# EAGLE board IronMan_ISTA (EAGLE 7.6.0)
AUTHOR: Kirchschlager Raimund
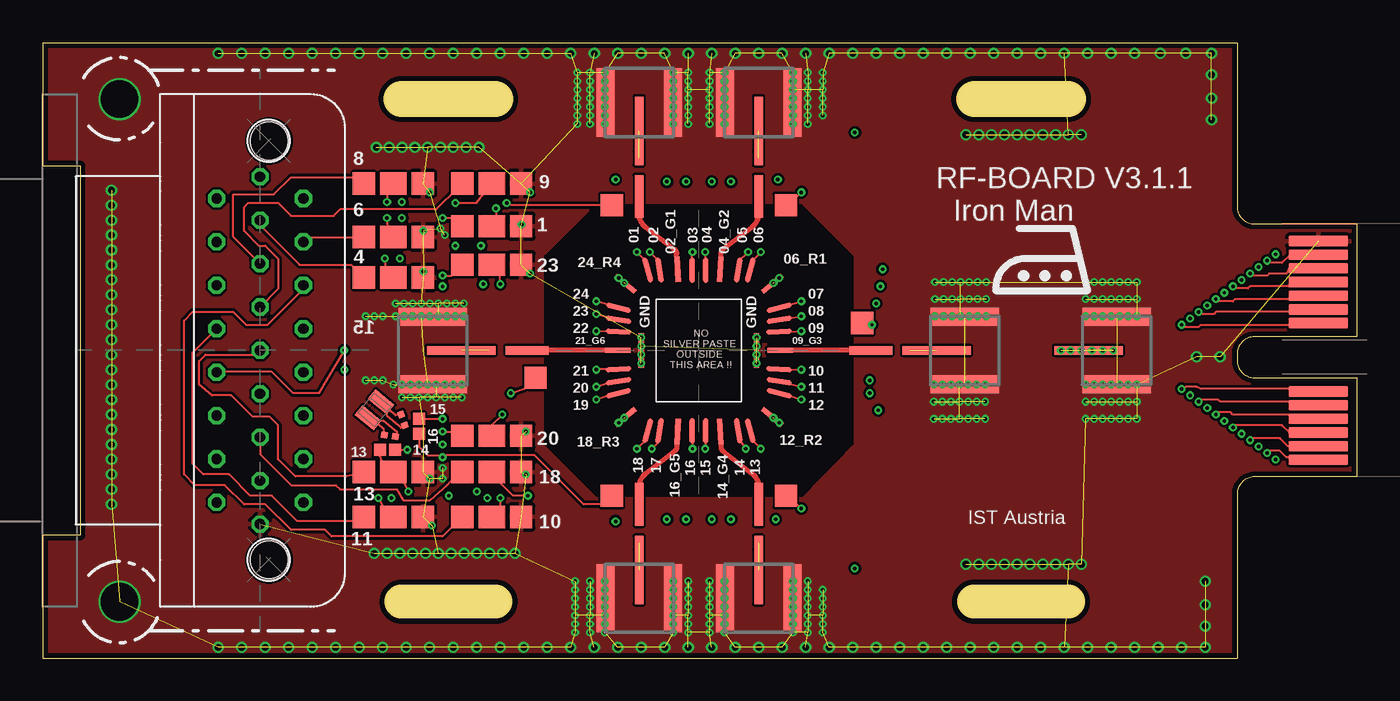
[diagram p0: board, top side]
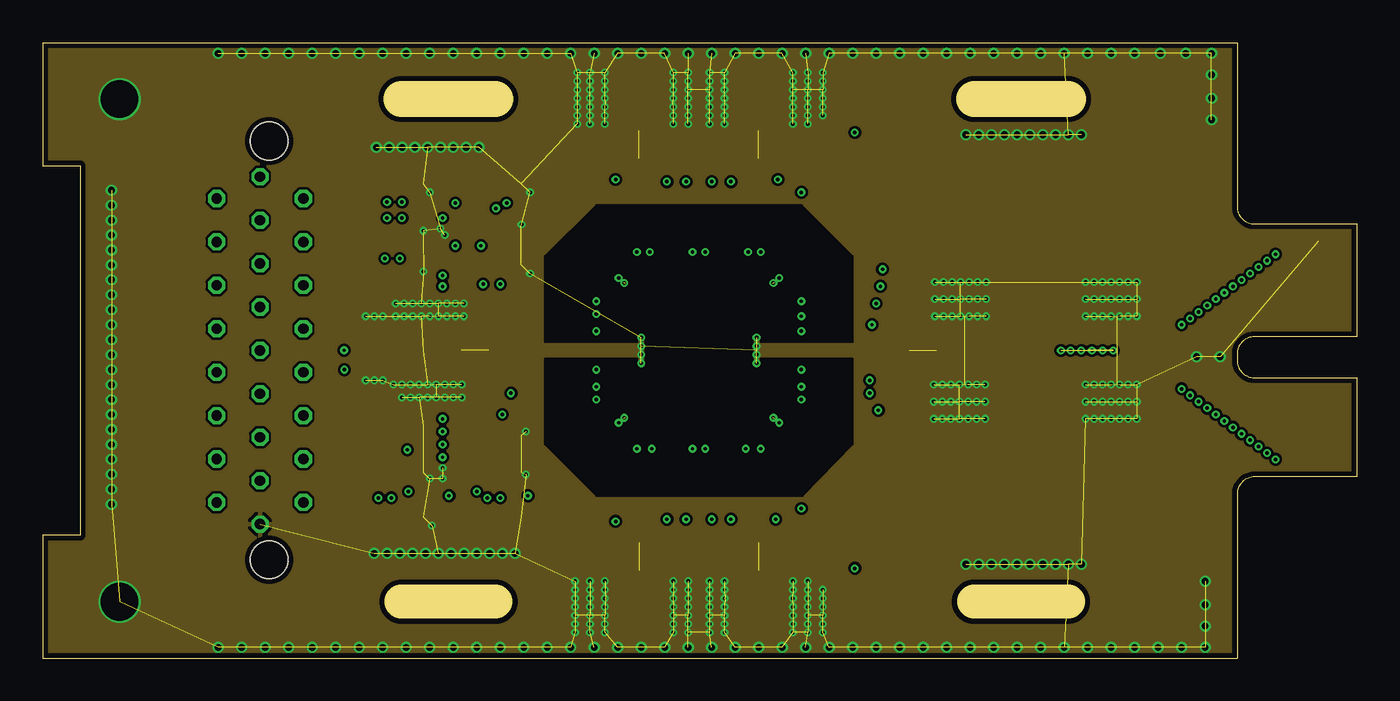
[diagram p1: board, inner layer Route2]
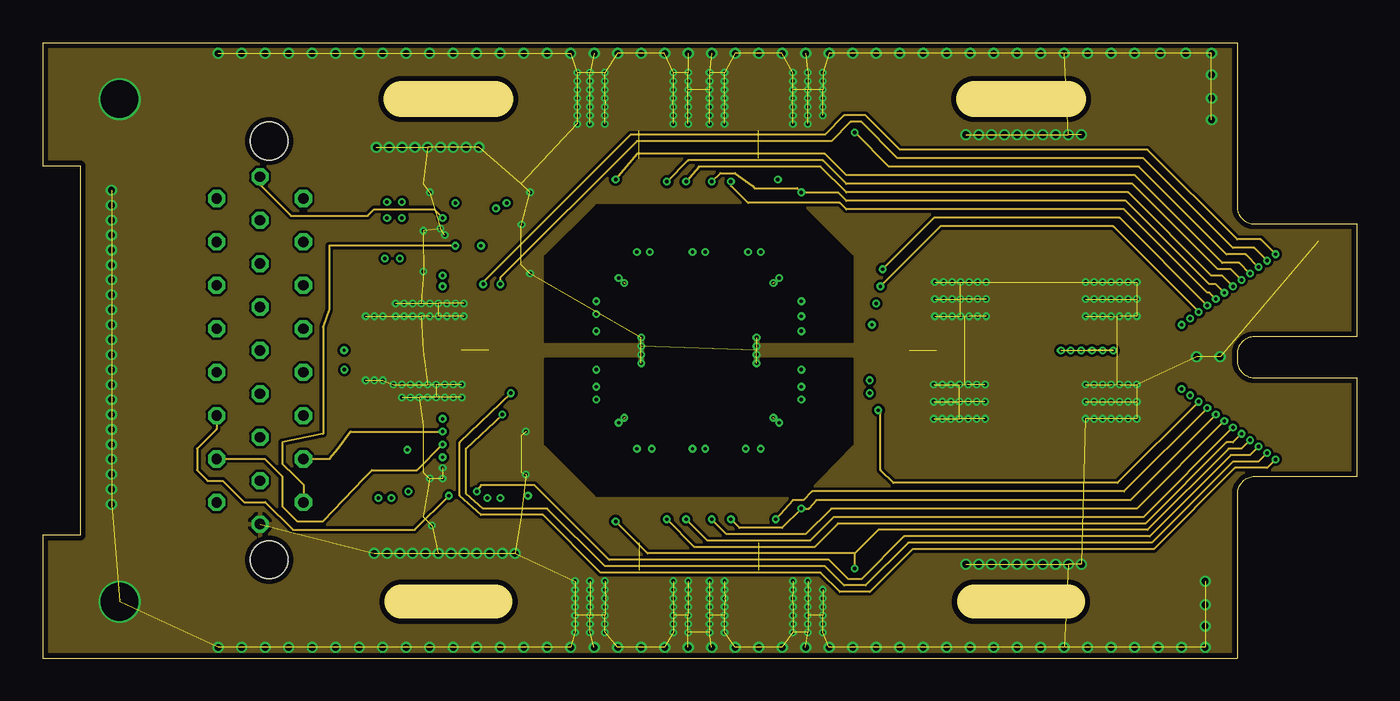
[diagram p2: board, inner layer Route3]
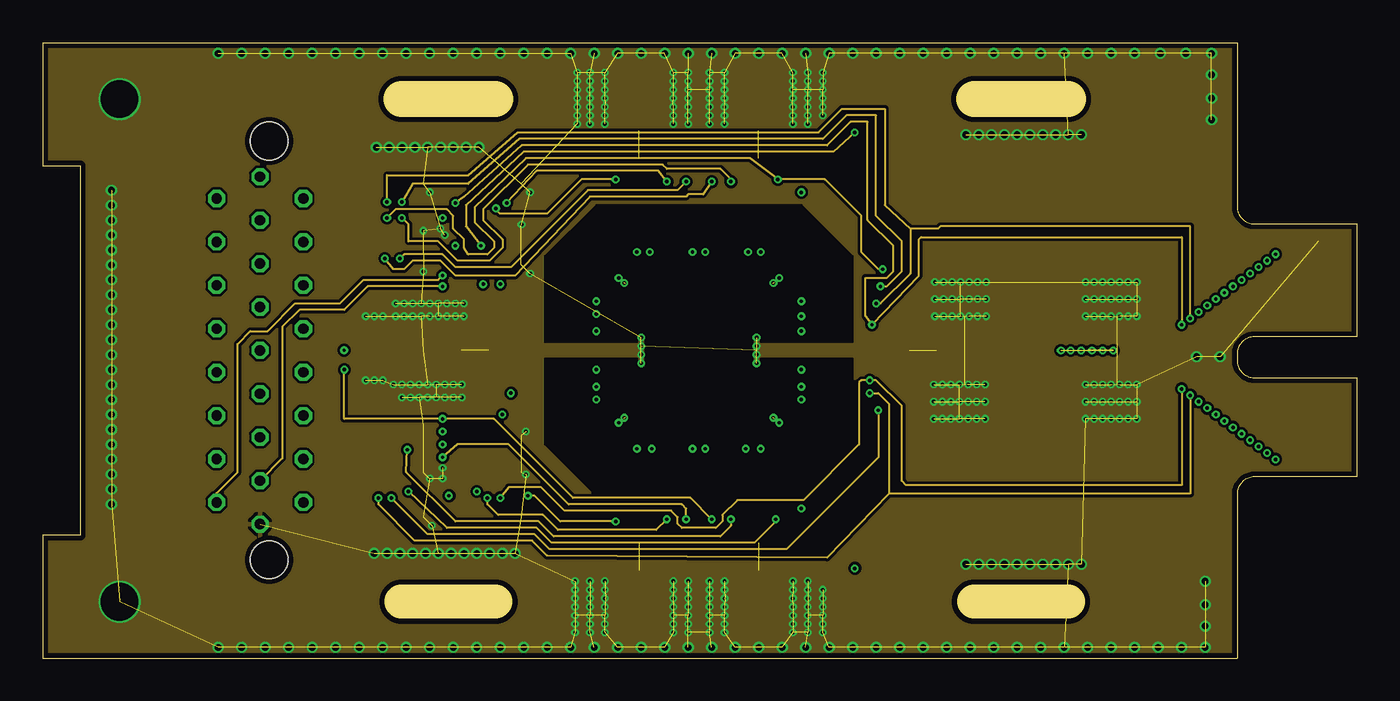
[diagram p3: board, inner layer Route14]
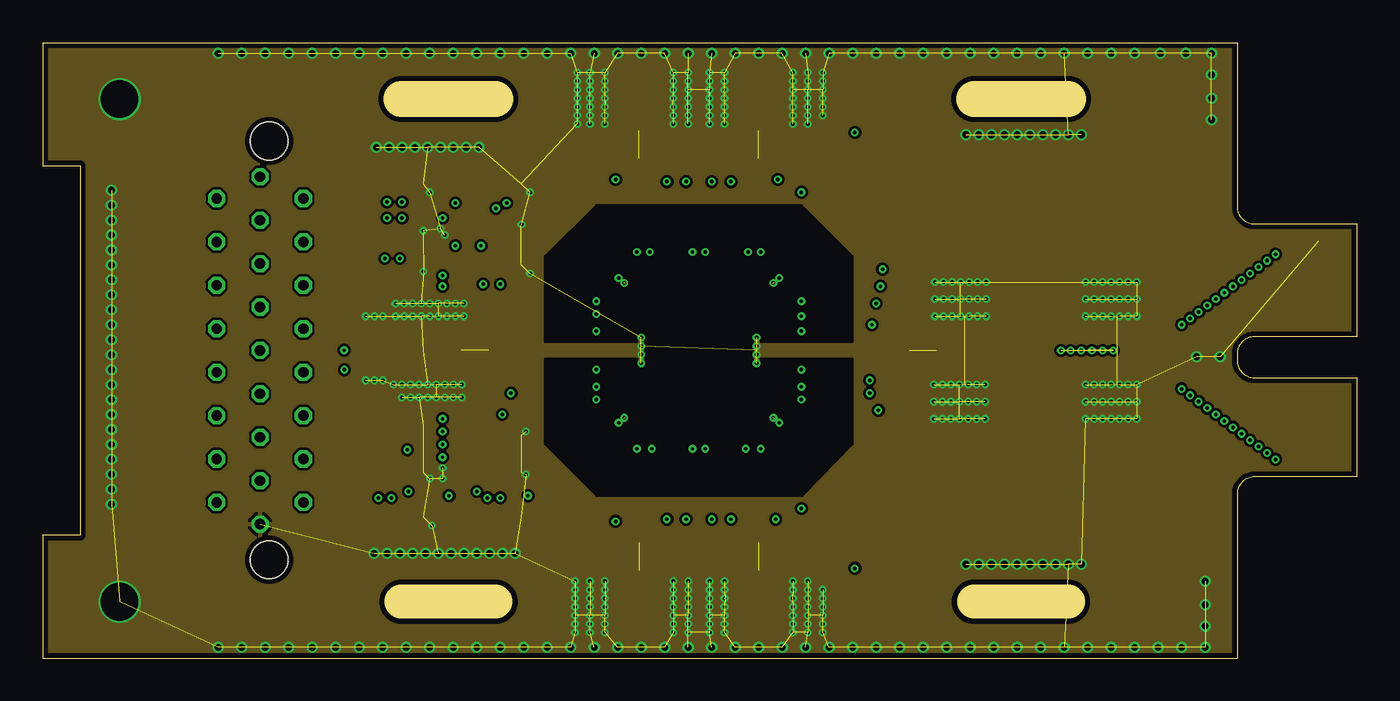
[diagram p4: board, inner layer Route15]
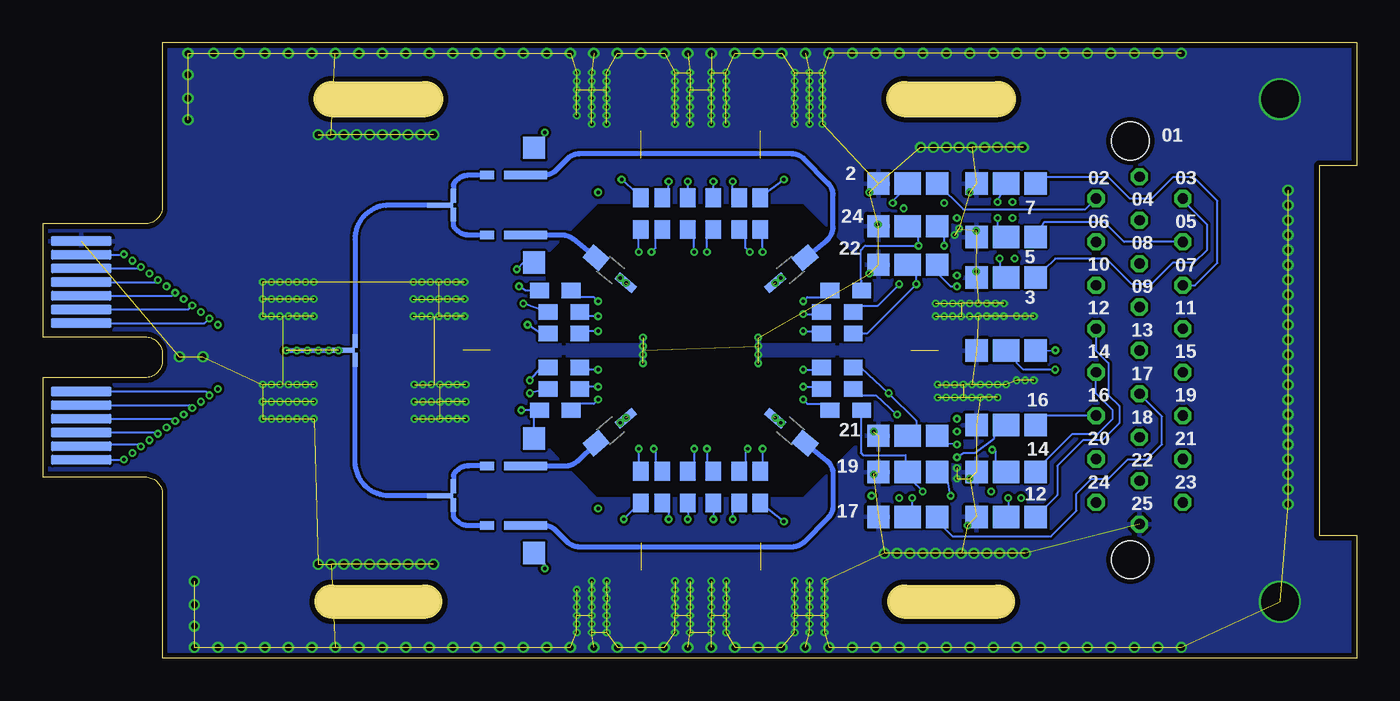
[diagram p5: board, bottom side, seen from below]

Size 76.9 x 36 mm. Coordinates in mm from the lower left corner, seen from the top.
Outline: 26.5,3.3 21,3.3
Outline: 26.5,32.7 21,32.7
Outline: 60,32.7 54.5,32.7
Outline: 60,3.3 54.5,3.3
Outline: 0,36 0,28.8 2.2,28.8 2.2,7.2 0,7.2 0,0 69.9,0 69.9,9.6 arc-90 70.9,10.6 76.9,10.6 76.9,16.4 70.9,16.4 arc-90 69.9,17.4 69.9,17.8 arc-90 70.9,18.8 76.9,18.8 76.9,25.4 70.9,25.4 arc-90 69.9,26.4 69.9,36 0,36
Copper layers (1+2+3*14+15+16): Top 0.035mm / dielectric 0.2mm / Route2 0.035mm / dielectric 0.36mm / Route3 0.035mm / dielectric 0.28mm / Route14 0.035mm / dielectric 0.36mm / Route15 0.035mm / dielectric 0.2mm / Bottom 0.035mm
Design rules "PCB-POOL HighSpec_ML6+ *": minimum track width 0.125mm, minimum drill 0.2mm, track to track 0.125mm, track to pad 0.125mm, pad to pad 0.125mm, via to via 0.125mm, smd to smd 0.125mm, copper to edge 0.3mm, drill to drill 0.2mm, minimum pad ring 0.2mm, minimum via ring 0.125mm, stop-mask expansion 0.065mm, vias tented up to drill 0.3mm, thermal gap 0.2mm
Net classes: 0 GND: clearance 0.15 mm; 1 RF: clearance 2 mm
Holes 2.2 mm at 13.25,5.75 13.25,30.25

## Footprints (pad centres in the part's own frame; a part is rotated, then mirrored left to right if it is on the bottom)
BIAS_TEE_DOWN_0603 = smd 0.8 x 0.5: HF 2.75,0 | smd 1.3 x 1.3: LF 0,1.6 | smd 2.5 x 0.5: OUT 0.5,0
BIAS_TEE_UP_0603 = smd 0.8 x 0.5: HF 2.75,0 | smd 1.3 x 1.3: LF 0,-1.6 | smd 2.5 x 0.5: OUT 0.5,0
24DC+10RF/400MU-PADS/0.7X0.7_V1.0 = smd 1.5 x 0.3 rotated 105: DC$01 -3,4.7 | smd 1.5 x 0.3 rotated 99: DC§02 -2.3,4.7 | smd 0.3 x 1.5: DC§03 -0.4,4.7; DC§04 0.4,4.7; DC§15 0.4,-4.7; DC§16 -0.4,-4.7 | smd 1.5 x 0.3 rotated 81: DC§05 2.3,4.7 | smd 1.5 x 0.3 rotated 75: DC§06 3,4.7 | smd 1.5 x 0.3 rotated 195: DC§07 4.7,2.5 | smd 1.5 x 0.3 rotated 189: DC§08 4.7,1.8 | smd 1.5 x 0.3 rotated 183: DC§09 4.7,1.1 | smd 1.5 x 0.3 rotated 177: DC§10 4.7,-1.1 | smd 1.5 x 0.3 rotated 171: DC§11 4.7,-1.8 | smd 1.5 x 0.3 rotated 165: DC§12 4.7,-2.5 | smd 1.5 x 0.3 rotated 285: DC§13 3,-4.7 | smd 1.5 x 0.3 rotated 279: DC§14 2.3,-4.7 | smd 1.5 x 0.3 rotated 261: DC§17 -2.3,-4.7 | smd 1.5 x 0.3 rotated 255: DC§18 -3,-4.7 | smd 1.5 x 0.3 rotated 15: DC§19 -4.7,-2.5 | smd 1.5 x 0.3 rotated 9: DC§20 -4.7,-1.8 | smd 1.5 x 0.3 rotated 3: DC§21 -4.7,-1.1 | smd 1.5 x 0.3 rotated 357: DC§22 -4.7,1.1 | smd 1.5 x 0.3 rotated 351: DC§23 -4.7,1.8 | smd 1.5 x 0.3 rotated 345: DC§24 -4.7,2.5 | smd 0.3 x 2: GND$1 -3.375,0; GND$2 3.375,0 | smd 1.5 x 0.3 rotated 93: RF$02_G1 -1.25,4.75 | smd 1.5 x 0.3 rotated 87: RF$04_G2 1.25,4.75 | smd 1.5 x 0.3 rotated 40: RF$06_R1 4.3,3.9; RF$18_R3 -4.3,-3.9 | smd 1.5 x 0.3: RF$09_G3 4.75,0; RF$21_G6 -4.75,0 | smd 1.5 x 0.3 rotated 140: RF$12_R2 4.3,-3.9; RF$24_R4 -4.3,3.9 | smd 1.5 x 0.3 rotated 273: RF$14_G4 1.25,-4.75 | smd 1.5 x 0.3 rotated 267: RF$16_G5 -1.25,-4.75
25_SOCKET_M83513/13-D_V2 = drill 0.6 octagon: 01 10.16,0; 02 8.89,-2.54; 03 8.89,2.54; 04 7.62,0; 05 6.35,2.54; 06 6.35,-2.54; 07 3.81,2.54; 08 5.08,0; 09 2.54,0; 10 3.81,-2.54; 11 1.27,2.54; 12 1.27,-2.54; 13 0,0; 14 -1.27,-2.54; 15 -1.27,2.54; 16 -3.81,-2.54; 17 -2.54,0; 18 -5.08,0; 19 -3.81,2.54; 20 -6.35,-2.54; 21 -6.35,2.54; 22 -7.62,0; 23 -8.89,2.54; 24 -8.89,-2.54; 25 -10.16,0
SMD0.8-0,5 = smd 0.8 x 0.5: 1 0,0
L_MATCH = smd 1.25 x 1: IN 1.125,0 | smd 1.3 x 0.5: OUT -1.15,0
LP-FILTER/1_STAGE/OS/0603_TOP = smd 1.3 x 1.3: $1 -1.6,0.01; $6 1.85,0.01 | smd 1.55 x 1.3: $4 0.125,0.01
LP-FILTER/1_STAGE/OS/0603_BOTTOM = smd 1.3 x 1.3 bottom: $1 -1.6,0.01; $6 1.85,0.01 | smd 1.55 x 1.3 bottom: $4 0.125,0.01
LP-FILTER/RESISTOR/0603_BOTTOM = smd 1.1 x 0.9 bottom: IN -0.925,0; OUT 0.925,0
SMP_STRAIGHT_MINI = smd 0.5 x 4: 1 0,1.653 | smd 1.05 x 4: 2@1 -1.975,0; 2@2 1.975,0
TP07SQ = smd 0.7 x 0.7: TP 0,0
MEC8-113-02-L-D-RA1 = smd 0.6 x 3.5: 1 6.4,0.15; 3 5.6,0.15; 5 4.8,0.15; 7 4,0.15; 9 3.2,0.15; 11 2.4,0.15; 13 -1.6,0.15; 15 -2.4,0.15; 17 -3.2,0.15; 19 -4,0.15; 21 -4.8,0.15; 23 -5.6,0.15; 25 -6.4,0.15 | smd 0.6 x 3.5 bottom: 2 6.4,0.15; 4 5.6,0.15; 6 4.8,0.15; 8 4,0.15; 10 3.2,0.15; 12 2.4,0.15; 14 -1.6,0.15; 16 -2.4,0.15; 18 -3.2,0.15; 20 -4,0.15; 22 -4.8,0.15; 24 -5.6,0.15; 26 -6.4,0.15
RX-BR_V1 = smd 0.406 x 0.406 rotated 105: I$1 -0.02,1.08; U$1 0.63,1.23 | smd 0.406 x 0.406 rotated 165: I$2 1.08,-0.02; U$2 1.23,0.63 | smd 1.422 x 0.711 rotated 45: P$2 -0.02,-0.87; P$3 -0.87,-0.02
T_JUNCTION_0.3MM = smd 0.3 x 1.5 bottom: P$1 0,-0.75 | smd 0.8 x 0.3 bottom: P$2 -0.55,0.03; P$3 0.55,0.03 | smd 1 x 0.125 bottom: P$4 0,-0.06

## Placement (x,y rotation side)
B$1  [BIAS_TEE_DOWN_0603]  34.9,26.5 90 top
B$2  [BIAS_TEE_UP_0603]  41.9,26.5 90 top
B$3  BIASTEEDOWN  [BIAS_TEE_DOWN_0603]  47.96,18 0 top
B$4  [BIAS_TEE_DOWN_0603]  41.9,9.5 270 top
B$5  [BIAS_TEE_UP_0603]  34.9,9.5 270 top
B$6  BIASTEEDOWN  [BIAS_TEE_DOWN_0603]  28.84,18 180 top
B$7  [BIAS_TEE_UP_0603]  48.15,28.25 180 bottom
B$8  [BIAS_TEE_DOWN_0603]  48.15,24.75 180 bottom
B$9  [BIAS_TEE_UP_0603]  48.15,11.25 180 bottom
B$10  [BIAS_TEE_DOWN_0603]  48.15,7.75 180 bottom
E$1  24DC+10RF  [24DC+10RF/400MU-PADS/0.7X0.7_V1.0]  38.4,18 0 top
E$2  [25_SOCKET_M83513/13-D_V2]  12.71,18 90 top
E$30  [SMD0.8-0,5]  50.9,11.25 0 bottom
L$1  L_MATCH  [L_MATCH]  33.14,22.7 40 bottom
L$2  L_MATCH  [L_MATCH]  43.66,22.7 140 bottom
L$3  L_MATCH  [L_MATCH]  43.66,13.3 220 bottom
L$4  L_MATCH  [L_MATCH]  33.14,13.3 320 bottom
LP$1  LP-FILTER/1-STAGETOP  [LP-FILTER/1_STAGE/OS/0603_TOP]  20.4,27.75 0 top
LP$2  LP-FILTER/1-STAGETOP  [LP-FILTER/1_STAGE/OS/0603_TOP]  20.4,24.62 0 top
LP$3  LP-FILTER/1-STAGETOP  [LP-FILTER/1_STAGE/OS/0603_TOP]  20.4,22.25 0 top
LP$4  LP-FILTER/1-STAGETOP  [LP-FILTER/1_STAGE/OS/0603_TOP]  20.4,18 180 bottom
LP$5  LP-FILTER/1-STAGETOP  [LP-FILTER/1_STAGE/OS/0603_TOP]  20.4,10.88 0 top
LP$6  LP-FILTER/1-STAGETOP  [LP-FILTER/1_STAGE/OS/0603_TOP]  20.4,8.25 0 top
LP$7  LP-FILTER/1-STAGEBOT  [LP-FILTER/1_STAGE/OS/0603_BOTTOM]  20.4,27.75 0 top
LP$8  LP-FILTER/1-STAGEBOT  [LP-FILTER/1_STAGE/OS/0603_BOTTOM]  20.4,24.62 0 top
LP$9  LP-FILTER/1-STAGEBOT  [LP-FILTER/1_STAGE/OS/0603_BOTTOM]  20.4,22.25 0 top
LP$10  LP-FILTER/1-STAGEBOT  [LP-FILTER/1_STAGE/OS/0603_BOTTOM]  26.15,27.75 0 top
LP$11  LP-FILTER/1-STAGEBOT  [LP-FILTER/1_STAGE/OS/0603_BOTTOM]  26.15,8.25 0 top
LP$12  LP-FILTER/1-STAGEBOT  [LP-FILTER/1_STAGE/OS/0603_BOTTOM]  20.4,13.62 0 top
LP$13  LP-FILTER/1-STAGEBOT  [LP-FILTER/1_STAGE/OS/0603_BOTTOM]  20.4,10.88 0 top
LP$14  LP-FILTER/1-STAGEBOT  [LP-FILTER/1_STAGE/OS/0603_BOTTOM]  20.4,8.25 0 top
LP$15  LP-FILTER/1-STAGETOP  [LP-FILTER/1_STAGE/OS/0603_TOP]  26.15,27.75 0 top
LP$16  LP-FILTER/1-STAGETOP  [LP-FILTER/1_STAGE/OS/0603_TOP]  26.15,25.25 0 top
LP$17  LP-FILTER/1-STAGETOP  [LP-FILTER/1_STAGE/OS/0603_TOP]  26.15,23 0 top
LP$18  LP-FILTER/1-STAGETOP  [LP-FILTER/1_STAGE/OS/0603_TOP]  26.15,13 0 top
LP$19  LP-FILTER/1-STAGETOP  [LP-FILTER/1_STAGE/OS/0603_TOP]  26.15,10.88 0 top
LP$20  LP-FILTER/1-STAGETOP  [LP-FILTER/1_STAGE/OS/0603_TOP]  26.15,8.25 0 top
LP$21  LP-FILTER/1-STAGEBOT  [LP-FILTER/1_STAGE/OS/0603_BOTTOM]  26.15,25.25 0 top
LP$22  LP-FILTER/1-STAGEBOT  [LP-FILTER/1_STAGE/OS/0603_BOTTOM]  26.15,23 0 top
LP$23  LP-FILTER/1-STAGEBOT  [LP-FILTER/1_STAGE/OS/0603_BOTTOM]  26.15,13 0 top
LP$24  LP-FILTER/1-STAGEBOT  [LP-FILTER/1_STAGE/OS/0603_BOTTOM]  26.15,10.88 0 top
R$1  10K  [LP-FILTER/RESISTOR/0603_BOTTOM]  34.9,26 270 top
R$2  10K  [LP-FILTER/RESISTOR/0603_BOTTOM]  36.15,26 270 top
R$3  10K  [LP-FILTER/RESISTOR/0603_BOTTOM]  37.65,26 270 top
R$4  10K  [LP-FILTER/RESISTOR/0603_BOTTOM]  39.15,26 270 top
R$5  10K  [LP-FILTER/RESISTOR/0603_BOTTOM]  40.65,26 270 top
R$6  10K  [LP-FILTER/RESISTOR/0603_BOTTOM]  41.9,26 270 top
R$7  10K  [LP-FILTER/RESISTOR/0603_BOTTOM]  46.4,20.25 180 top
R$8  10K  [LP-FILTER/RESISTOR/0603_BOTTOM]  46.4,19 180 top
R$9  10K  [LP-FILTER/RESISTOR/0603_BOTTOM]  46.4,17 180 top
R$10  10K  [LP-FILTER/RESISTOR/0603_BOTTOM]  46.4,15.75 180 top
R$11  10K  [LP-FILTER/RESISTOR/0603_BOTTOM]  46.9,14.5 180 top
R$12  10K  [LP-FILTER/RESISTOR/0603_BOTTOM]  41.9,10 90 top
R$19  10K  [LP-FILTER/RESISTOR/0603_BOTTOM]  29.9,14.5 0 top
R$20  10K  [LP-FILTER/RESISTOR/0603_BOTTOM]  30.4,15.75 0 top
R$21  10K  [LP-FILTER/RESISTOR/0603_BOTTOM]  30.4,17 0 top
R$22  10K  [LP-FILTER/RESISTOR/0603_BOTTOM]  30.4,19 0 top
R$23  10K  [LP-FILTER/RESISTOR/0603_BOTTOM]  30.4,20.25 0 top
R$24  10K  [LP-FILTER/RESISTOR/0603_BOTTOM]  29.9,21.5 0 top
R$25  10K  [LP-FILTER/RESISTOR/0603_BOTTOM]  46.9,21.5 180 top
R$26  10K  [LP-FILTER/RESISTOR/0603_BOTTOM]  40.65,10 90 top
R$27  10K  [LP-FILTER/RESISTOR/0603_BOTTOM]  39.15,10 90 top
R$28  10K  [LP-FILTER/RESISTOR/0603_BOTTOM]  37.65,10 90 top
R$29  10K  [LP-FILTER/RESISTOR/0603_BOTTOM]  36.15,10 90 top
R$30  10K  [LP-FILTER/RESISTOR/0603_BOTTOM]  34.9,10 90 top
S$1  MC-921  [SMP_STRAIGHT_MINI]  22.84,18 270 top
S$2  MC-921  [SMP_STRAIGHT_MINI]  34.9,3.5 0 top
S$3  MC-921  [SMP_STRAIGHT_MINI]  41.9,3.5 0 top
S$4  MC-921  [SMP_STRAIGHT_MINI]  53.96,18 90 top
S$5  MC-921  [SMP_STRAIGHT_MINI]  62.85,18 90 top
S$6  MC-921  [SMP_STRAIGHT_MINI]  41.9,32.5 180 top
S$7  MC-921  [SMP_STRAIGHT_MINI]  34.9,32.5 180 top
TP1  TPTP07SQ  [TP07SQ]  22.02,14 0 top
TP2  TPTP07SQ  [TP07SQ]  22.02,13.12 0 top
TP3  TPTP07SQ  [TP07SQ]  20.62,12.18 0 top
TP4  TPTP07SQ  [TP07SQ]  19.74,12.18 90 top
U$1  MEC8-113-02-L-D-RA1MBRD  [MEC8-113-02-L-D-RA1]  74.5,18 270 top
U$2  TEMPSENS  [RX-BR_V1]  19.9,14.12 275.6 top
U$3  TJUNCTION  [T_JUNCTION_0.3MM]  52.9,26.5 90 top
U$4  TJUNCTION  [T_JUNCTION_0.3MM]  58.65,18 90 top
U$5  TJUNCTION  [T_JUNCTION_0.3MM]  52.9,9.5 90 top

## Library data of the parts
B$1-B$10 = Bias tee
E$1 = SampleArea
E$2 = Glenair
E$30 = PADS
L$1-L$4 = MatchCircuit
LP$1-LP$24 R$1-R$12 R$19-R$30 = LPFilter
S$1-S$7 = RF Connectors
TP1-TP4 = testpad
U$1 = MEC8-130-02-X-D-RA1
U$2 = TempSensors
U$3-U$5 = RF layout parts

## Nets
C$1: E$2.01 LP$16.$1
C$2: E$2.02 LP$10.$1
C$3: E$2.03 LP$9.$1
C$4: E$2.04 LP$3.$1
C$5: E$2.05 LP$8.$1
C$6: E$2.06 LP$2.$1
C$7: E$2.07 LP$7.$1
C$8: E$2.08 LP$1.$1
C$9: E$2.09 LP$15.$1
C$10: E$2.10 LP$20.$1
C$11: E$2.11 LP$6.$1
C$12: E$2.12 LP$14.$1
C$13: E$2.13 LP$5.$1
C$14: E$2.14 LP$13.$1
C$15: E$2.15 LP$4.$1
C$16: E$2.16 LP$12.$1
C$17: E$2.17 LP$11.$1
C$18: E$2.18 LP$19.$1
C$19: E$2.19 LP$24.$1
C$20: E$2.20 LP$18.$1
C$21: E$2.21 LP$23.$1
C$22: E$2.22 LP$22.$1
C$23: E$2.23 LP$17.$1
C$24: E$2.24 LP$21.$1
D$1: LP$16.$4 R$1.IN U$1.21
D$2: B$1.LF LP$10.$4 R$2.IN U$1.20
D$3: LP$9.$4 R$3.IN U$1.19
D$4: B$2.LF LP$3.$4 R$4.IN U$1.18
D$5: LP$8.$4 R$5.IN U$1.17
D$6: B$8.LF LP$2.$4 R$6.IN U$1.16
D$7: LP$7.$4 R$25.IN U$1.15
D$8: LP$1.$4 R$7.IN U$1.14
D$9: B$3.LF LP$15.$4 R$8.IN U$1.13
D$10: LP$20.$4 R$9.IN U$1.11
D$11: LP$6.$4 R$10.IN U$1.12
D$12: B$9.LF LP$14.$4 R$11.IN U$1.9
D$13: LP$5.$4 R$12.IN TP4.TP U$1.10
D$14: B$4.LF LP$13.$4 R$26.IN TP3.TP U$1.7
D$15: LP$4.$4 R$27.IN TP1.TP U$1.8
D$16: B$5.LF LP$12.$4 R$28.IN TP2.TP U$1.5
D$17: LP$11.$4 R$29.IN U$1.6
D$18: B$10.LF LP$19.$4 R$30.IN U$1.3
D$19: LP$24.$4 R$19.IN U$1.4
D$20: LP$18.$4 R$20.IN U$1.1
D$21: B$6.LF LP$23.$4 R$21.IN U$1.2
D$22: LP$22.$4 R$22.IN U$1.24
D$23: LP$17.$4 R$23.IN U$1.23
D$24: B$7.LF LP$21.$4 R$24.IN U$1.22
DC$1: E$1.DC$01 R$1.OUT
DC$2: E$1.DC§02 R$2.OUT
DC$3: E$1.DC§03 R$3.OUT
DC$4: E$1.DC§04 R$4.OUT
DC$5: E$1.DC§05 R$5.OUT
DC$6: E$1.DC§06 R$6.OUT
DC$7: E$1.DC§07 R$25.OUT
DC$8: E$1.DC§08 R$7.OUT
DC$9: E$1.DC§09 R$8.OUT
DC$10: E$1.DC§10 R$9.OUT
DC$11: E$1.DC§11 R$10.OUT
DC$12: E$1.DC§12 R$11.OUT
DC$13: E$1.DC§13 R$12.OUT
DC$14: E$1.DC§14 R$26.OUT
DC$15: E$1.DC§15 R$27.OUT
DC$16: E$1.DC§16 R$28.OUT
DC$17: E$1.DC§17 R$29.OUT
DC$18: E$1.DC§18 R$30.OUT
DC$19: E$1.DC§19 R$19.OUT
DC$20: E$1.DC§20 R$20.OUT
DC$21: E$1.DC§21 R$21.OUT
DC$22: E$1.DC§22 R$22.OUT
DC$23: E$1.DC§23 R$23.OUT
DC$24: E$1.DC§24 R$24.OUT
GND: E$1.GND$1 E$1.GND$2 E$2.25 LP$1.$6 LP$2.$6 LP$3.$6 LP$4.$6 LP$5.$6 LP$6.$6 LP$7.$6 LP$8.$6 LP$9.$6 LP$10.$6 LP$11.$6 LP$12.$6 LP$13.$6 LP$14.$6 LP$15.$6 LP$16.$6 LP$17.$6 LP$18.$6 LP$19.$6 LP$20.$6 LP$21.$6 LP$22.$6 LP$23.$6 LP$24.$6 S$1.2@1 S$1.2@2 S$2.2@1 S$2.2@2 S$3.2@1 S$3.2@2 S$4.2@1 S$4.2@2 S$5.2@1 S$5.2@2 S$6.2@1 S$6.2@2 S$7.2@1 S$7.2@2 U$1.25 U$1.26
N$1 [RF]: B$6.HF S$1.1
N$2: E$1.RF$12_R2 L$3.OUT
N$3 [RF]: B$1.OUT E$1.RF$02_G1
N$4 [RF]: B$2.OUT E$1.RF$04_G2
N$5 [RF]: B$1.HF S$7.1
N$6 [RF]: B$2.HF S$6.1
N$7 [RF]: B$5.OUT E$1.RF$16_G5
N$8 [RF]: B$4.OUT E$1.RF$14_G4
N$9 [RF]: E$1.RF$18_R3 L$4.OUT
N$10 [RF]: E$1.RF$24_R4 L$1.OUT
N$11 [RF]: E$1.RF$06_R1 L$2.OUT
N$12 [RF]: B$3.OUT E$1.RF$09_G3
N$13 [RF]: B$9.OUT L$3.IN
N$14 [RF]: B$8.OUT L$2.IN
N$15 [RF]: B$9.HF U$5.P$3
N$16 [RF]: B$5.HF S$2.1
N$17 [RF]: B$4.HF S$3.1
N$18 [RF]: B$3.HF S$4.1
N$19 [RF]: B$7.HF U$3.P$3
N$20 [RF]: B$6.OUT E$1.RF$21_G6
N$21 [RF]: S$5.1 U$4.P$1
N$22 [RF]: B$10.HF U$5.P$2
N$23 [RF]: B$8.HF U$3.P$2
N$25 [RF]: U$3.P$1 U$4.P$3
N$26 [RF]: U$4.P$2 U$5.P$1
RF$3 [RF]: B$10.OUT L$4.IN
RF$4 [RF]: B$7.OUT L$1.IN

## Tracks (layer width: path | path; a pad name or v marks a point on that pad's centre or on a via)
C$1  (via drill 0.2)
  Top 0.125: v23.4,25.75 24.18,25.75 LP$16.$1
  Route3 0.125: E$2.01 12.71,27.69 14.52,25.88 19.02,25.88 19.4,26.25 22.9,26.25 v23.4,25.75
C$2
  Bottom 0.125: LP$10.$1 24.53,27.76 23.02,26.25 15.89,26.25 E$2.02
C$3
  Bottom 0.125: 10.17,26.77 8.77,25.38 8.77,23.88 9.52,23.12 10.77,23.12 12.02,21.88 13.15,21.88 14.65,23.38 17.65,23.38 18.27,22.75 18.31,22.75
  Bottom 0.3: E$2.03 10.17,26.77 | 18.31,22.75 LP$9.$1
C$4
  Top 0.125: LP$3.$1 18.06,23 15.02,23 12.71,25.31 E$2.04
C$5
  Bottom 0.125: E$2.05 13.62,24.35 14.77,25.5 18.31,25.5 LP$8.$1
C$6
  Top 0.125: E$2.06 15.52,24.62 LP$2.$1
C$7
  Bottom 0.125: E$2.07 9.46,21.81 8.15,23.12 8.15,26.75 9.52,28.12 10.77,28.12 12.02,26.88 13.27,26.88 14.52,28.12 18.43,28.12 LP$7.$1
C$8
  Top 0.125: LP$1.$1 18.4,27.75 18.27,28.12 14.52,28.12 13.52,27.12 11.15,27.12 11.15,24.64 E$2.08
  Top 0.3: LP$1.$1
C$9
  Top 0.125: LP$15.$1 24.3,27.52 23.02,26.25 17.4,26.25 17.02,25.88 14.52,25.88 13.77,26.62 12.02,26.62 11.77,26.38 11.77,25 12.65,24.12 13.02,24.12 13.77,23.38 13.77,21.6 E$2.09
C$10
  Top 0.125: LP$20.$1 24.17,7.9 23.4,7.12 16.9,7.12 16.52,7.5 14.52,7.5 13.02,9 11.77,9 10.65,10.12 8.9,10.12 8.27,10.75 8.27,19.75 8.77,20.25 11.15,20.25 11.9,19.5 13.15,19.5 15.02,21.38 15.07,21.62 E$2.10
C$11
  Top 0.125: LP$6.$1 18.54,8.26 18.27,8 14.89,8.01 13.4,9.5 12.15,9.5 10.9,10.75 9.4,10.75 8.77,11.38 8.77,17.87 E$2.11
C$12
  Bottom 0.125: E$2.12 15.25,17.98 14.52,17.25 14.52,15.38 13.9,14.75 13.9,13.75 14.9,12.75 16.02,12.75 17.52,11.25 17.52,9.54 LP$14.$1
C$13
  Top 0.125: LP$5.$1 18.8,10.85 17.77,10.62 14.77,10.62 13.77,11.62 13.77,13.62 13.27,14.12 12.27,14.12 11.02,15.38 9.9,15.38 9.15,16 9.15,17.38 9.52,17.75 12.46,17.75 E$2.13
C$14
  Bottom 0.125: LP$13.$1 18.55,11.22 16.65,13.12 15.15,13.12 14.27,14 14.27,14.5 15.27,15.5 15.27,16.71 E$2.14
C$15  (via drill 0.2)
  Top 0.125: v17.64,18.01 16.15,15.5 14.65,15.5 13.4,16.75 10.2,16.75 E$2.15
  Bottom 0.125: LP$4.$1 v17.64,18.01
C$16
  Bottom 0.125: E$2.16 18.37,14.19 LP$12.$1
C$17
  Bottom 0.125: LP$11.$1 24.53,8.01 23.65,7.12 17.9,7.12 16.4,8.62 16.4,9.62 15.52,10.5 14.52,10.5 13.4,11.62 12.27,11.62 11.4,12.5 11.4,14.14 E$2.17
C$18
  Top 0.125: E$2.18 12.71,11.93 14.52,10.12 17.15,10.12 17.4,9.88 20.71,9.88 21.09,9.25 22.66,9.25 23.65,10.12 23.9,10.38 LP$19.$1
C$19  (via drill 0.2)
  Route3 0.125: E$2.19 10.17,13.4 9.02,12.25 9.02,11 9.65,10.38 10.52,10.38 11.77,9.12 13.02,9.12 14.65,7.5 21.77,7.5 v23.77,9.5
  Bottom 0.125: v23.77,9.5 23.9,10.23 LP$24.$1
C$20  (via drill 0.2)
  Top 0.125: 24.04,12.5 LP$18.$1 24.31,13.25 v23.4,13.25
  Route3 0.125: E$2.20 16.8,11.65 17.27,12.25 18.02,13.25 v23.4,13.25
C$21  (via drill 0.2)
  Route3 0.125: E$2.21 13,11.65 14.02,10.62 14.02,8.88 14.9,8 16.4,8 18.77,10.5 19.27,11 21.9,11 v23.4,12.5
  Bottom 0.125: v23.4,12.5 24.46,12.54 LP$23.$1
C$22  (via drill 0.2)
  Route14 0.125: v23.4,21.75 19.02,21.75 17.65,20.38 15.02,20.38 14.02,19.38 14.02,11.69 E$2.22
  Bottom 0.125: LP$22.$1 24.55,22.52 23.77,21.75 v23.4,21.75
C$23  (via drill 0.2)
  Top 0.125: 24.55,22.52 LP$17.$1 23.91,22.38 v23.4,22.38
  Route14 0.125: E$2.23 10.17,9.65 11.4,10.88 11.4,18.38 12.15,19.12 13.15,19.12 14.77,20.75 17.4,20.75 18.77,22.12 23.15,22.12 v23.4,22.38
C$24  (via drill 0.2)
  Route3 0.125: v24.15,24.12 16.77,24.12 16.77,20.38 16.4,19.38 16.4,13.12 14.02,12.62 14.02,11.38 14.77,10.62 15.27,10.13 E$2.24
  Bottom 0.125: LP$21.$1 24.17,24.65 v24.15,24.12
D$1  (via drill 0.2)
  Top 0.125: v26.52,26.31 26.52,25.38 LP$16.$4 | U$1.21 72.95,22.8 72.78,22.5 71.78,22.5 71.65,22.38 70.78,22.38 v70.65,22.5
  Route3 0.125: v70.65,22.5 70.03,23.12 69.03,23.12 63.9,28.25 47.02,28.25 45.77,29.5 34.77,29.5 v33.52,28
  Route14 0.125: v33.52,28 31.52,28 29.52,26 26.77,26 26.52,26.25 v26.52,26.31
  Bottom 0.125: R$1.IN 34.9,27 v33.52,28
D$2  (via drill 0.2)
  Top 0.125: B$1.LF 27.4,26.5 v27.15,26.62
  Route3 0.125: v70.15,22.12 69.53,22.75 68.78,22.75 63.77,27.75 47.02,27.75 45.65,29.12 37.77,29.12 v36.52,27.88
  Route14 0.125: v36.52,27.88 36.02,28.5 28.9,28.5 v27.15,26.62
  Bottom 0.125: R$2.IN 36.32,26.93 36.52,27.12 v36.52,27.88 | v27.15,26.62 v27.14,26.62 27.14,26.76 26.77,27.12 LP$10.$4 | U$1.20 70.28,22 v70.15,22.12
D$3  (via drill 0.2)
  Top 0.125: U$1.19 73.03,21.88 72.9,21.75 70.65,21.75 70.53,21.62 69.78,21.62 v69.65,21.75
  Route3 0.125: v69.65,21.75 69.03,22.38 68.4,22.38 63.52,27.25 47.02,27.25 45.52,28.75 38.4,28.75 v37.65,27.88
  Route14 0.125: v37.65,27.88 37.15,27.38 31.9,27.38 27.4,22.88 24.15,22.88 23.4,23.62 21.15,23.62 v20.9,23.38
  Bottom 0.125: R$3.IN v37.65,27.88 | v20.9,23.38 20.9,22 LP$9.$4
D$4  (via drill 0.2)
  Top 0.125: v20.02,23.38 20.02,22.5 19.9,21.76 LP$3.$4 | B$2.LF 43.65,26.5 v44.4,27.25
  Route3 0.125: v69.15,21.38 68.65,21.88 68.28,21.88 63.4,26.75 47.02,26.75 46.52,27.25 v44.4,27.25 44.15,27.5 41.65,27.5 41.52,27.62 40.52,28.38 39.65,28.38 v39.15,27.88
  Route14 0.125: v39.15,27.88 38.65,27.12 37.77,27.12 37.65,27 32.02,27 27.65,22.38 24.15,22.38 23.27,23.25 21.65,23.25 21.15,22.75 20.52,22.75 v20.02,23.38
  Bottom 0.125: R$4.IN v39.15,27.88 | U$1.18 69.33,21.2 v69.15,21.38
D$5  (via drill 0.2)
  Top 0.125: U$1.17 74.45,21.07 73.03,21 69.78,21 69.65,20.88 68.78,20.88 v68.65,21
  Route3 0.125: v68.65,21 68.28,21.38 68.15,21.38 63.27,26.25 47.02,26.25 46.65,26.62 41.27,26.62 40.27,27.62 v40.27,27.88
  Route14 0.125: v40.27,27.88 40.27,28 39.65,28.62 36.52,28.62 36.27,28.88 28.4,28.88 25.77,26.25 25.77,25.62 26.9,24.5 26.9,24 26.15,23.25 24.27,23.25 23.15,24.38 21.4,24.38 21.4,25.38 v21.02,25.75
  Bottom 0.125: R$5.IN 40.65,27 40.27,27.38 v40.27,27.88 | v21.02,25.75 21.02,25.26 LP$8.$4
D$6  (via drill 0.2)
  Top 0.125: v20.15,25.75 20.15,25.38 LP$2.$4
  Route3 0.125: v68.15,20.62 63.02,25.75 52.15,25.75 v49.15,22.75 49.02,22.75
  Route14 0.125: v49.15,22.75 48.9,22.75 47.9,23.75 47.9,25.88 45.77,28 v43.02,28 41.4,29.25 28.27,29.25 25.27,26.38 25.27,25.5 26.4,24.38 26.4,24 26.02,23.62 24.9,23.62 24.65,24 24.65,24.5 24.02,25.12 24.02,25.88 23.65,26.25 20.65,26.25 v20.15,25.75
  Bottom 0.125: R$6.IN 41.9,27 v43.02,28 | B$8.LF 48.75,23.15 v49.15,22.75 | U$1.16 68.38,20.4 v68.15,20.62
D$7  (via drill 0.2)
  Top 0.125: U$1.15 74.42,20.27 73.05,20.27 73.03,20.25 68.65,20.25 68.53,20.12 67.78,20.12 v67.65,20.25
  Route3 0.125: v67.65,20.25 62.65,25.25 52.52,25.25 v49.02,21.75
  Route14 0.125: v49.02,21.75 49.4,21.75 50.27,22.62 50.27,24.38 48.77,25.88 48.77,31.75 47.02,31.75 45.65,30.38 27.9,30.38 24.9,27.75 21.65,27.75 v21.02,26.69
  Bottom 0.125: R$25.IN 48.65,21.5 v49.02,21.75 | v21.02,26.69 LP$7.$4
D$8  (via drill 0.2)
  Top 0.125: LP$1.$4 20.15,27.5 v20.15,26.69
  Route14 0.125: v20.15,26.69 20.15,28.25 24.9,28.25 27.77,30.75 45.4,30.75 46.77,32.12 49.27,32.12 49.27,26.5 50.77,25.12 | v67.15,19.88 67.15,25.25 52.52,25.25 52.4,25.12 50.77,25.12 | 50.77,25.12 50.77,22.5 49.02,20.75 v48.77,20.75
  Bottom 0.125: v48.77,20.75 R$7.IN | U$1.14 67.42,19.6 v67.15,19.88
D$9  (via drill 0.2)
  Top 0.125: v24.15,26.62 25.4,26.63 LP$15.$4 | B$3.LF 47.9,19.62 48.02,19.62 v48.52,19.5 | v66.65,19.5 66.78,19.38 67.65,19.38 67.78,19.5 74.55,19.5 U$1.13
  Route14 0.125: v24.15,26.62 24.65,27 28.02,30 45.9,30 47.27,31.38 48.27,31.38 48.27,25.62 49.77,24.12 49.77,22.62 49.4,22.25 48.15,22.25 48.15,20 v48.52,19.5 51.27,22.38 51.27,24.5 51.4,24.62 66.65,24.62 v66.65,19.5
  Bottom 0.125: R$8.IN 47.77,19 v48.52,19.5
D$10  (via drill 0.2)
  Top 0.125: v26.77,9.38 26.77,8.62 26.65,8.63 LP$20.$4 | U$1.11 73.05,15.6 72.9,15.75 67.78,15.75 67.53,15.88 66.9,15.88 v66.65,15.75
  Route14 0.125: v26.77,9.38 27.27,10 29.15,10 30.52,8.62 36.77,8.62 37.15,8.25 37.15,7.88 37.4,7.62 39.4,7.62 39.77,8 39.77,8.38 40.65,9.25 44.52,9.25 47.77,12.5 47.77,16.12 47.9,16.25 v48.4,16.25 48.77,16.25 50.27,14.75 50.27,10.38 50.52,10.12 66.65,10.12 v66.65,15.75
  Bottom 0.125: R$9.IN 47.77,17 v48.4,16.25
D$11  (via drill 0.2)
  Top 0.125: v19.65,9.38 19.9,8.88 19.9,8.62 LP$6.$4
  Route14 0.125: v48.4,15.5 48.9,15.5 49.52,14.88 49.52,9.62 | 49.52,9.62 45.9,5.88 29.52,6 28.65,6.88 21.77,6.88 19.65,9 v19.65,9.38 | v67.15,15.38 67.15,9.62 49.52,9.62
  Bottom 0.125: R$10.IN v48.4,15.5 | U$1.12 67.38,15.6 v67.15,15.38
D$12  (via drill 0.2)
  Top 0.125: U$1.9 73.1,14.8 72.9,15 68.9,15 68.78,15.12 67.78,15.12 v67.65,15
  Route3 0.125: v67.65,15 62.9,10.25 49.77,10.25 49.02,11 49.02,14.38 v48.9,14.5
  Route14 0.125: v48.9,14.5 48.9,11.75 43.52,6.38 29.65,6.38 28.77,7.25 22.52,7.25 v20.4,9.38
  Bottom 0.125: B$9.LF 48.15,14.18 R$11.IN v48.9,14.5 | v20.4,9.38 20.4,8.88 LP$14.$4
D$13  (via drill 0.2)
  Top 0.125: v21.4,9.75 21.15,10.25 20.27,10.76 LP$5.$4 19.77,11.63 19.77,11.75 19.49,12.04 TP4.TP
  Route3 0.125: v68.15,14.62 63.27,9.75 45.02,9.75 44.52,9.25 43.9,9.25 v42.9,8.12
  Route14 0.125: v42.9,8.12 42.9,8 41.65,6.75 29.77,6.75 28.9,7.62 23.65,7.62 v21.4,9.75
  Bottom 0.125: R$12.IN 41.95,9.07 v42.9,8.12 | U$1.10 68.33,14.8 v68.15,14.62
D$14  (via drill 0.2)
  Top 0.125: TP3.TP v21.34,12.19 | U$1.7 73.15,14 72.9,14.25 69.65,14.25 69.53,14.38 68.78,14.38 v68.65,14.25 | B$4.LF 43.65,9.5 v44.4,8.75
  Route3 0.125: v68.65,14.25 63.65,9.25 45.27,9.25 44.84,8.75 v44.4,8.75 43.27,7.62 40.77,7.62 v40.27,8.12
  Route14 0.125: v40.27,8.12 40.27,7.75 39.65,7.12 29.9,7.12 29.02,8 24.15,8 21.27,10.88 v21.34,12.19
  Bottom 0.125: R$26.IN 40.65,9 40.27,8.62 v40.27,8.12 | v21.34,12.19 21.15,12.12 21.15,11 LP$13.$4
D$15  (via drill 0.2)
  Top 0.125: TP1.TP v23.4,14
  Route3 0.125: v69.15,13.88 64.03,8.75 46.15,8.75 44.65,7.25 40.02,7.25 v39.15,8.12
  Route14 0.125: v39.15,8.12 37.9,9.38 31.02,9.38 26.4,14 v23.4,14 17.65,14 v17.65,16.88
  Bottom 0.125: R$27.IN v39.15,8.12 | U$1.8 69.28,14 v69.15,13.88 | v17.65,16.88 19.52,16.88 19.9,17.25 19.9,17.36 LP$4.$4
D$16  (via drill 0.2)
  Top 0.125: B$5.LF 33.3,9.4 32.77,9.12 32.77,9 31.65,9 28.77,11.88 23.52,11.88 v23.4,11.75 23.27,11.88 22.52,11.88 22.02,12.38 TP2.TP | U$1.5 72.95,13.2 72.53,13.62 69.78,13.62 v69.65,13.5
  Route3 0.125: v69.65,13.5 64.4,8.25 46.27,8.25 44.9,6.88 38.9,6.88 v37.65,8.12
  Route14 0.125: v37.65,8.12 37.65,8.75 37.4,9 30.77,9 27.27,12.5 24.27,12.5 v23.4,11.75
  Bottom 0.125: R$28.IN v37.65,8.12 | v23.4,11.75 23.02,12 22.34,12 21.21,12.88 21.21,13.5 LP$12.$4
D$17  (via drill 0.2)
  Route3 0.125: v70.15,13.12 69.65,12.62 69.28,12.62 64.53,7.88 46.52,7.88 45.15,6.5 38.15,6.5 v36.52,8.12
  Route14 0.125: v36.52,8.12 35.9,7.5 30.15,7.5 29.27,8.38 26.65,8.38 26.02,9 v26.02,9.38
  Bottom 0.125: R$29.IN 36.15,9 36.52,8.62 v36.52,8.12 | v26.02,9.38 26.02,8.88 26.52,8.01 LP$11.$4 | U$1.6 70.22,13.2 v70.15,13.12
D$18  (via drill 0.2)
  Top 0.125: v28.4,9.5 27.52,9.5 26.9,10.12 LP$19.$4 | U$1.3 72.88,12.4 72.4,12.88 70.78,12.88 v70.65,12.75
  Route3 0.125: v70.65,12.75 70.15,12.25 69.4,12.25 64.65,7.5 48.9,7.5 47.52,6.12 | 47.52,6.12 35.4,6.12 v33.52,8 | v47.52,5.25 47.52,6.12
  Route14 0.125: v33.52,8 30.27,8 28.77,9.5 v28.4,9.5
  Bottom 0.125: R$30.IN v33.52,8 | B$10.LF 48.15,6.12 47.52,5.5 v47.52,5.25
D$19  (via drill 0.2)
  Route3 0.125: v71.15,12.38 70.65,11.88 69.53,11.88 64.78,7.12 50.4,7.12 47.9,4.62 47.15,4.62 46.02,5.75 33.15,5.75 28.77,10.12 25.65,10.12 v25.4,9.75
  Bottom 0.125: R$19.IN 28.97,14.3 29.02,14.12 29.02,12 28.9,11.88 26.4,11.88 26.4,10.63 LP$24.$4 25.77,10.13 v25.4,9.75 | U$1.4 73.03,12.38 72.88,12.53 71.3,12.53 v71.15,12.38
D$20  (via drill 0.2)
  Top 0.125: v26.9,14.25 26.27,13.62 LP$18.$4 | U$1.1 73.05,11.6 72.9,11.75 72.78,11.75 72.4,12.12 71.78,12.12 v71.65,12
  Route3 0.125: v71.65,12 71.15,11.5 69.65,11.5 64.9,6.75 50.65,6.75 48.15,4.25 46.9,4.25 45.77,5.38 32.9,5.38 29.52,8.75 25.77,8.75 24.77,9.62 24.77,12.25 v26.9,14.25
  Bottom 0.125: R$20.IN 28.9,15.38 28.15,15.38 v26.9,14.25
D$21  (via drill 0.2)
  Top 0.125: v27.4,15.5 28.17,15.75 B$6.LF
  Route3 0.125: v72.15,11.62 71.65,11.12 69.78,11.12 65.03,6.38 50.9,6.38 48.4,3.88 46.65,3.88 45.52,5 32.65,5 29.27,8.38 25.65,8.38 24.4,9.5 24.4,12.62 v27.4,15.5
  Bottom 0.125: LP$23.$4 25.77,13.51 25.77,13.88 v27.4,15.5 29.02,17 R$21.IN | U$1.2 72.25,11.6 v72.15,11.62
D$22  (via drill 0.2)
  Route3 0.125: v72.15,23.62 71.28,24.5 69.9,24.5 64.65,29.75 50.15,29.75 48.15,31.75 46.9,31.75 45.77,30.62 34.4,30.62 25.77,22 v25.77,21.88
  Bottom 0.125: R$22.IN 28.65,19 v25.77,21.88 25.77,22.62 LP$22.$4 | U$1.24 72.3,23.6 v72.15,23.62
D$23  (via drill 0.2)
  Top 0.125: v26.77,21.88 26.77,22.38 LP$17.$4 | U$1.23 73,23.6 72.53,23.12 71.78,23.12 v71.65,23.25
  Route3 0.125: v71.65,23.25 70.9,24 69.65,24 64.4,29.25 50.02,29.25 47.9,31.38 47.27,31.38 46.15,30.25 34.77,30.25 26.77,22.25 v26.77,21.88
  Bottom 0.125: R$23.IN 29.02,20.62 28.02,20.62 v26.77,21.88
D$24  (via drill 0.2)
  Route3 0.125: v71.15,22.88 70.4,23.62 69.28,23.62 64.15,28.75 49.52,28.75 v47.52,30.75
  Route14 0.125: v47.52,30.75 46.27,29.62 28.15,29.62 24.77,26.5 24.77,25.25 v25.65,24.12
  Bottom 0.125: R$24.IN 28.97,22.07 29.02,22.12 29.02,23.88 28.77,24.12 v25.65,24.12 25.65,24.88 LP$21.$4 | B$7.LF 48.15,30 48.4,30.25 47.59,30.44 v47.52,30.75 | U$1.22 71.22,22.8 v71.15,22.88
DC$1  (via drill 0.2)
  Top 0.125: E$1.DC$01 35.27,23.25 v34.77,23.75
  Bottom 0.125: v34.77,23.75 34.77,24.95 R$1.OUT
DC$2  (via drill 0.2)
  Top 0.125: E$1.DC§02 35.98,23.3 v35.52,23.75
  Bottom 0.125: v35.52,23.75 35.77,24 35.77,24.62 R$2.OUT
DC$3  (via drill 0.2)
  Top 0.125: E$1.DC§03 38,23.73 v38.02,23.75
  Bottom 0.125: v38.02,23.75 38.02,24.7 R$3.OUT
DC$4  (via drill 0.2)
  Top 0.125: E$1.DC§04 38.8,23.65 v38.77,23.75
  Bottom 0.125: v38.77,23.75 38.77,24.7 R$4.OUT
DC$5  (via drill 0.2)
  Top 0.125: E$1.DC§05 40.7,23.18 v41.27,23.75
  Bottom 0.125: v41.27,23.75 41.02,24 41.02,24.57 R$5.OUT
DC$6  (via drill 0.2)
  Top 0.125: E$1.DC§06 41.52,23.25 v42.02,23.75
  Bottom 0.125: v42.02,23.75 42.02,24.62 41.9,24.95 R$6.OUT
DC$7  (via drill 0.2)
  Top 0.125: E$1.DC§07 43.52,20.62 v44.4,20.88
  Bottom 0.125: v44.4,20.88 44.65,21.12 45.52,21.12 45.77,21.38 45.9,21.38 45.98,21.45 R$25.OUT
DC$8  (via drill 0.2)
  Top 0.125: E$1.DC§08 v44.4,20
  Bottom 0.125: v44.4,20 45.27,20 R$7.OUT
DC$9  (via drill 0.2)
  Top 0.125: E$1.DC§09 v44.4,19.12
  Bottom 0.125: v44.4,19.12 45.4,19.12 R$8.OUT
DC$10  (via drill 0.2)
  Top 0.125: E$1.DC§10 v44.4,16.88
  Bottom 0.125: v44.4,16.88 45.4,16.88 R$9.OUT
DC$11  (via drill 0.2)
  Top 0.125: E$1.DC§11 v44.4,15.88
  Bottom 0.125: v44.4,15.88 45.52,15.88 R$10.OUT
DC$12  (via drill 0.2)
  Top 0.125: E$1.DC§12 43.65,15.38 v44.4,15.12
  Bottom 0.125: v44.4,15.12 44.65,14.88 45.9,14.88 R$11.OUT
DC$13  (via drill 0.2)
  Top 0.125: E$1.DC§13 41.52,12.75 v42.02,12.25
  Bottom 0.125: v42.02,12.25 42.02,11 R$12.OUT
DC$14  (via drill 0.2)
  Top 0.125: E$1.DC§14 40.77,12.75 v41.15,12.25
  Bottom 0.125: v41.15,12.25 41.02,12.12 41.02,11.12 40.9,11 R$26.OUT
DC$15  (via drill 0.2)
  Top 0.125: E$1.DC§15 v38.77,12.25
  Bottom 0.125: v38.77,12.25 38.77,11.12 R$27.OUT
DC$16  (via drill 0.2)
  Top 0.125: E$1.DC§16 v38.02,12.25
  Bottom 0.125: v38.02,12.25 38.02,11 R$28.OUT
DC$17  (via drill 0.2)
  Top 0.125: E$1.DC§17 36.02,12.62 v35.65,12.25
  Bottom 0.125: v35.65,12.25 35.77,12.25 35.77,11 35.9,11 R$29.OUT
DC$18  (via drill 0.2)
  Top 0.125: E$1.DC§18 35.27,12.75 v34.77,12.25
  Bottom 0.125: v34.77,12.25 34.77,11 R$30.OUT
DC$19  (via drill 0.2)
  Top 0.125: E$1.DC§19 33.15,15.38 v32.4,15.12
  Bottom 0.125: v32.4,15.12 32.15,14.88 31.2,14.88 R$19.OUT
DC$20  (via drill 0.2)
  Top 0.125: E$1.DC§20 33.1,16.07 v32.4,15.88
  Bottom 0.125: v32.4,15.88 31.45,15.88 R$20.OUT
DC$21  (via drill 0.2)
  Top 0.125: E$1.DC§21 32.42,16.9 v32.4,16.88
  Bottom 0.125: v32.4,16.88 31.45,16.88 R$21.OUT
DC$22  (via drill 0.2)
  Top 0.125: E$1.DC§22 33.12,19.1 v32.4,19.12
  Bottom 0.125: v32.4,19.12 31.4,19.12 R$22.OUT
DC$23  (via drill 0.2)
  Top 0.125: E$1.DC§23 33.1,19.93 v32.4,20.12
  Bottom 0.125: v32.4,20.12 31.4,20.12 R$23.OUT
DC$24  (via drill 0.2)
  Top 0.125: E$1.DC§24 33.27,20.62 v32.4,20.88
  Bottom 0.125: v32.4,20.88 32.15,21.12 31.02,21.12 30.95,21.2 30.95,21.38 R$24.OUT
GND  (via drill 0.2, 0.4, 2.2)  (485 unrouted)
  other vias: 52.21,22 52.71,22 53.21,22 53.71,22 54.21,22 54.71,22 55.21,22 52.21,21 52.71,21 53.21,21 53.71,21 54.21,21 54.71,21 55.21,21 52.21,20 52.71,20 53.21,20 53.71,20 54.21,20 54.71,20 55.21,20 52.15,16 52.65,16 53.15,16 53.65,16 54.15,16 54.65,16 55.15,16 52.15,15 52.65,15 53.15,15 53.65,15 54.15,15 54.65,15 55.15,15 52.15,14 52.65,14 53.15,14 53.65,14 54.15,14 54.65,14 55.15,14 61.02,22 61.52,22 62.02,22 62.52,22 63.02,22 63.52,22 64.03,22 61.02,21 61.52,21 62.02,21 62.52,21 63.02,21 63.52,21 64.03,21 61.02,20 61.52,20 62.02,20 62.52,20 63.02,20 63.52,20 64.03,20 61.02,16 61.52,16 62.02,16 62.52,16 63.02,16 63.52,16 64.03,16 61.02,15 61.52,15 62.02,15 62.52,15 63.02,15 63.52,15 64.03,15 61.02,14 61.52,14 62.02,14 62.52,14 63.02,14 63.52,14 64.03,14 32.9,34.25 32.9,33.75 32.9,33.25 32.9,32.75 32.9,32.25 32.9,31.75 32.9,31.25 32.02,34.25 32.02,33.75 32.02,33.25 32.02,32.75 32.02,32.25 32.02,31.75 32.02,31.25 31.27,31.25 31.27,31.75 31.27,32.25 31.27,32.75 31.27,33.25 31.27,33.75 31.27,34.25 36.9,34.25 36.9,33.75 36.9,33.25 36.9,32.75 36.9,32.25 36.9,31.75 36.9,31.25 39.9,34.25 39.9,33.75 39.9,33.25 39.9,32.75 39.9,32.25 39.9,31.75 39.9,31.25 37.77,34.25 37.77,33.75 37.77,33.25 37.77,32.75 37.77,32.25 37.77,31.75 37.77,31.25 39.02,31.25 39.02,31.75 39.02,32.25 39.02,32.75 39.02,33.25 39.02,33.75 39.02,34.25 43.9,34.25 43.9,33.75 43.9,33.25 43.9,32.75 43.9,32.25 43.9,31.75 43.9,31.25 44.77,31.25 44.77,31.75 44.77,32.25 44.77,32.75 44.77,33.25 44.77,33.75 44.77,34.25 45.65,31.75 45.65,32.25 45.65,32.75 45.65,33.25 45.65,33.75 45.65,34.25 32.9,4.5 32.9,4 32.9,3.5 32.9,3 32.9,2.5 32.9,2 32.9,1.5 36.9,4.5 36.9,4 36.9,3.5 36.9,3 36.9,2.5 36.9,2 36.9,1.5 37.77,4.5 37.77,4 37.77,3.5 37.77,3 37.77,2.5 37.77,2 37.77,1.5 32.02,4.5 32.02,4 32.02,3.5 32.02,3 32.02,2.5 32.02,2 32.02,1.5 39.9,4.5 39.9,4 39.9,3.5 39.9,3 39.9,2.5 39.9,2 39.9,1.5 39.02,1.5 39.02,2 39.02,2.5 39.02,3 39.02,3.5 39.02,4 39.02,4.5 43.9,4.5 43.9,4 43.9,3.5 43.9,3 43.9,2.5 43.9,2 43.9,1.5 44.77,1.5 44.77,2 44.77,2.5 44.77,3 44.77,3.5 44.77,4 44.77,4.5 31.15,4.5 31.15,4 31.15,3.5 31.15,3 31.15,2.5 31.15,2 31.15,1.5 45.65,4 45.65,3.5 45.65,3 45.65,2.5 45.65,2 45.65,1.5 24.52,16 24.02,16 23.52,16 23.02,16 22.52,16 22.02,16 21.52,16 21.02,16 24.65,20 24.15,20 23.65,20 23.15,20 22.65,20 22.15,20 21.65,20 21.15,20 21.02,15.25 21.52,15.25 22.02,15.25 22.52,15.25 23.02,15.25 23.52,15.25 24.02,15.25 24.52,15.25 20.52,16 20.65,20 24.65,20.75 24.15,20.75 23.65,20.75 23.15,20.75 22.65,20.75 22.15,20.75 21.65,20.75 21.15,20.75 20.65,20.75 4.02,27.38 4.02,26.5 4.02,25.62 4.02,24.75 4.02,23.88 4.02,23 4.02,22.12 4.02,21.25 4.02,20.38 4.02,19.5 4.02,18.62 4.02,17.75 4.02,16.88 4.02,16 4.02,15.12 4.02,14.25 4.02,13.38 4.02,12.5 4.02,11.62 4.02,10.75 4.02,9.88 4.02,9 41.9,35.38 43.27,35.38 40.52,35.38 39.15,35.38 37.77,35.38 36.4,35.38 35.02,35.38 33.65,35.38 32.27,35.38 30.9,35.38 29.52,35.38 28.15,35.38 26.77,35.38 25.4,35.38 24.02,35.38 22.65,35.38 21.27,35.38 19.9,35.38 18.52,35.38 17.15,35.38 15.77,35.38 14.4,35.38 13.02,35.38 11.65,35.38 10.27,35.38 44.65,35.38 46.02,35.38 47.4,35.38 48.77,35.38 50.15,35.38 51.52,35.38 52.9,35.38 54.27,35.38 55.65,35.38 57.02,35.38 58.4,35.38 59.77,35.38 61.15,35.38 62.52,35.38 63.9,35.38 65.4,35.38 25.52,29.88 24.77,29.88 24.02,29.88 23.27,29.88 22.52,29.88 21.77,29.88 21.02,29.88 20.27,29.88 19.52,29.88 54.02,30.62 54.77,30.62 55.52,30.62 56.27,30.62 57.02,30.62 57.77,30.62 58.52,30.62 59.27,30.62 60.02,30.62 60.77,30.62 54.02,5.5 54.77,5.5 55.52,5.5 56.27,5.5 57.02,5.5 57.77,5.5 58.52,5.5 59.27,5.5 60.02,5.5 60.77,5.5 19.4,6.12 20.15,6.12 20.9,6.12 21.65,6.12 22.4,6.12 23.15,6.12 23.9,6.12 24.65,6.12 25.4,6.12 26.15,6.12 26.9,6.12 27.65,6.12 10.27,0.62 11.65,0.62 13.02,0.62 14.4,0.62 15.77,0.62 17.15,0.62 18.52,0.62 19.9,0.62 21.27,0.62 22.65,0.62 24.02,0.62 25.4,0.62 26.77,0.62 28.15,0.62 29.52,0.62 30.9,0.62 32.27,0.62 33.65,0.62 35.02,0.62 36.4,0.62 37.77,0.62 39.15,0.62 40.52,0.62 41.9,0.62 43.27,0.62 44.65,0.62 46.02,0.62 47.4,0.62 48.77,0.62 50.15,0.62 51.52,0.62 52.9,0.62 54.27,0.62 55.65,0.62 57.02,0.62 58.4,0.62 59.77,0.62 61.15,0.62 62.52,0.62 63.9,0.62 65.28,0.62 68.9,17.62 67.53,17.62 35.02,18.75 35.02,17.25 35.02,18.25 35.02,17.75 41.77,18.25 41.77,17.75 41.77,18.75 41.77,17.25 23.4,11.12 23.4,10.5 19.9,16.25 19.4,16.25 18.9,16.25 19.9,20 19.4,20 18.9,20 23.27,25.12 23.52,24.75 22.65,27.25 28.52,27.25 22.27,25 28.02,25.38 28.52,22.5 22.27,22.62 22.65,10.5 22.77,7.75 28.27,10.75 28.27,13.25 66.9,35.38 68.4,35.38 68.4,34.12 68.4,32.75 68.4,31.5 66.65,0.62 68.03,0.62 68.03,1.88 68.03,3.12 68.03,4.5 4.5,3.3 4.5,32.7
  pour Top (rank 6): -4.85,39.6 81.6,39.7 81.6,-4.7 -4.85,-4.8
  pour Route2 (rank 6): -7.5,41.1 82.1,41.6 82.1,-5.15 -7.5,-5.65
  pour Route15 (rank 6): -11.25,44.5 84.4,44.5 84.4,-11.4 -11.25,-11.4
  pour Route3 (rank 6): -15.4,47.8 85.9,47.8 85.9,-13.85 -15.4,-13.75
  pour Bottom (rank 6): -16.65,49.3 86.65,49.2 86.65,-15.85 -16.65,-15.75
  pour Route14 (rank 6): -12.9,45.3 85.4,45.2 85.4,-12.85 -12.9,-12.75
N$1  (1 unrouted)
N$2  (1 unrouted)
N$3
  Top 0.3: E$1.RF$02_G1 37.1,23.68 arc49 36.98,23.9 35.29,25.2 arc-52 34.9,25.99 B$1.OUT
N$4
  Top 0.3: E$1.RF$04_G2 39.7,23.73 arc-50 39.82,23.96 41.5,25.2 arc53 41.9,26 B$2.OUT
N$5  (1 unrouted)
N$6  (1 unrouted)
N$7
  Top 0.3: E$1.RF$16_G5 37.1,12.32 arc-49 36.98,12.1 35.29,10.8 arc52 34.9,10.01 B$5.OUT
N$8
  Top 0.3: E$1.RF$14_G4 39.7,12.32 arc49 39.82,12.1 41.51,10.8 arc-52 41.9,10.01 B$4.OUT
N$9  (1 unrouted)
N$10  (1 unrouted)
N$11  (1 unrouted)
N$12
  Top 0.3: B$3.OUT E$1.RF$09_G3
N$13
  Bottom 0.3: B$9.OUT 46.3,11.25 arc-44 45.61,11.53 L$3.IN
N$14
  Bottom 0.3: L$2.IN 45.87,24.52 arc-39 46.51,24.75 B$8.OUT
N$15
  Bottom 0.3: B$9.HF 51.97,11.25 arc-46 52.7,10.94 52.79,10.85 arc-44 52.87,10.64 U$5.P$3
N$16  (1 unrouted)
N$17  (1 unrouted)
N$18  (1 unrouted)
N$19
  Bottom 0.3: B$7.HF 51.96,28.25 arc-47 52.7,27.93 52.79,27.83 arc-43 52.87,27.62 U$3.P$3
N$20
  Top 0.3: E$1.RF$21_G6 B$6.OUT
N$21  (1 unrouted)
  Bottom 0.3: 62.65,18 U$4.P$1
N$22
  Bottom 0.3: B$10.HF 51.97,7.75 arc47 52.7,8.06 52.79,8.16 arc43 52.87,8.37 U$5.P$2
N$23
  Bottom 0.3: B$8.HF 51.97,24.75 arc47 52.7,25.07 52.79,25.16 arc43 52.87,25.37 U$3.P$2
N$25
  Bottom 0.3: U$3.P$1 56.63,26.5 arc-90 58.63,24.5 U$4.P$3
N$26
  Bottom 0.3: U$5.P$1 56.62,9.5 arc90 58.62,11.5 U$4.P$2
RF$3
  Bottom 0.3: L$4.IN 31.02,11.55 arc51 30.65,10.78 30.65,8.91 arc45 30.94,8.21 32.36,6.79 arc45 33.06,6.5 45.49,6.5 arc45 46.19,6.79 46.86,7.46 arc-45 47.56,7.75 B$10.OUT
RF$4
  Bottom 0.3: L$1.IN 31.02,24.45 arc-51 30.65,25.23 30.65,27.09 arc-45 30.94,27.79 32.36,29.21 arc-45 33.06,29.5 45.49,29.5 arc-45 46.19,29.21 46.86,28.54 arc45 47.56,28.25 B$7.OUT
S$1  (via drill 0.2)  (5 unrouted)
  other vias: 59.59,18 60.15,18 62.65,18 62.02,18 61.4,18 60.77,18
S$116  (via drill 0.2)
  other vias: 34.04,14.06
S$145  (via drill 0.2)
  other vias: 42.76,14.06
S$165
  cutout Route2: 44.46,9.51 42.9,9.5 32.4,9.5 29.4,12.5 29.4,17.5 34.77,17.5 34.77,17 35.27,17 35.27,19 34.77,19 34.77,18.5 29.4,18.5 29.4,23.5 32.4,26.5 44.4,26.5 47.4,23.5 47.4,18.5 42.02,18.5 42.02,19 41.52,19 41.52,17 42.02,17 42.02,17.5 47.4,17.5 47.4,12.5
  cutout Route3: 44.46,9.51 42.9,9.5 32.4,9.5 29.4,12.5 29.4,17.5 34.77,17.5 34.77,17 35.27,17 35.27,19 34.77,19 34.77,18.5 29.4,18.5 29.4,23.5 32.4,26.5 44.4,26.5 47.4,23.5 47.4,18.5 42.02,18.5 42.02,19 41.52,19 41.52,17 42.02,17 42.02,17.5 47.4,17.5 47.4,12.5
  cutout Route14: 44.46,9.51 42.9,9.5 32.4,9.5 29.4,12.5 29.4,17.5 34.77,17.5 34.77,17 35.27,17 35.27,19 34.77,19 34.77,18.5 29.4,18.5 29.4,23.5 32.4,26.5 44.4,26.5 47.4,23.5 47.4,18.5 42.02,18.5 42.02,19 41.52,19 41.52,17 42.02,17 42.02,17.5 47.4,17.5 47.4,12.5
  cutout Route15: 44.46,9.51 42.9,9.5 32.4,9.5 29.4,12.5 29.4,17.5 34.77,17.5 34.77,17 35.27,17 35.27,19 34.77,19 34.77,18.5 29.4,18.5 29.4,23.5 32.4,26.5 44.4,26.5 47.4,23.5 47.4,18.5 42.02,18.5 42.02,19 41.52,19 41.52,17 42.02,17 42.02,17.5 47.4,17.5 47.4,12.5
  cutout Top: 44.46,9.51 42.9,9.5 32.4,9.5 29.4,12.5 29.4,17.5 34.77,17.5 34.77,17 35.27,17 35.27,19 34.77,19 34.77,18.5 29.4,18.5 29.4,23.5 32.4,26.5 44.4,26.5 47.4,23.5 47.4,18.5 42.02,18.5 42.02,19 41.52,19 41.52,17 42.02,17 42.02,17.5 47.4,17.5 47.4,12.5
  cutout Bottom: 44.46,9.51 42.9,9.5 32.4,9.5 29.4,12.5 29.4,17.5 34.77,17.5 34.77,17 35.27,17 35.27,19 34.77,19 34.77,18.5 29.4,18.5 29.4,23.5 32.4,26.5 44.4,26.5 47.4,23.5 47.4,18.5 42.02,18.5 42.02,19 41.52,19 41.52,17 42.02,17 42.02,17.5 47.4,17.5 47.4,12.5
S$167  (via drill 0.2)
  other vias: 33.7,22.23 33.7,22.23
S$169  (via drill 0.2)
  other vias: 33.7,13.77
S$172  (via drill 0.2)
  other vias: 43.1,13.77
S$173  (via drill 0.2)
  other vias: 42.76,21.94
S$214  (via drill 0.2)
  other vias: 43.1,22.23
S$215  (via drill 0.2)
  other vias: 34.04,21.94

## Text on the board
tPlace: 8 | 9 | 6 | RF-BOARD V3.1.1 / Iron Man | 1 | 4 | 23 | 15 | NO / SILVER PASTE / OUTSIDE / THIS AREA !! | 15 | 13 | 14 | 16 | 20 | 18 | 13 | 10 | IST Austria | 11
bPlace: 01 | 03 | 02 | 2 | 04 | 05 | 06 | 7 | 08 | 24 | 22 | 07 | 10 | 5 | 09 | 11 | 12 | 3 | 13 | 15 | 14 | 17 | 19 | 16 | 16 | 18 | 21 | 20 | 21 | 22 | 14 | 23 | 24 | 19 | 25 | 12 | 17